# Altium PCB NE-CurrentSense-V1.0.PcbDoc
Units mm, origin at the board's own origin, x right, y up, seen from the top; angles counter-clockwise.
Board outline 94 x 55 mm, 2 copper layers (Top Layer, Bottom Layer); 35 components, 20 nets, 102 pads, 132 vias.
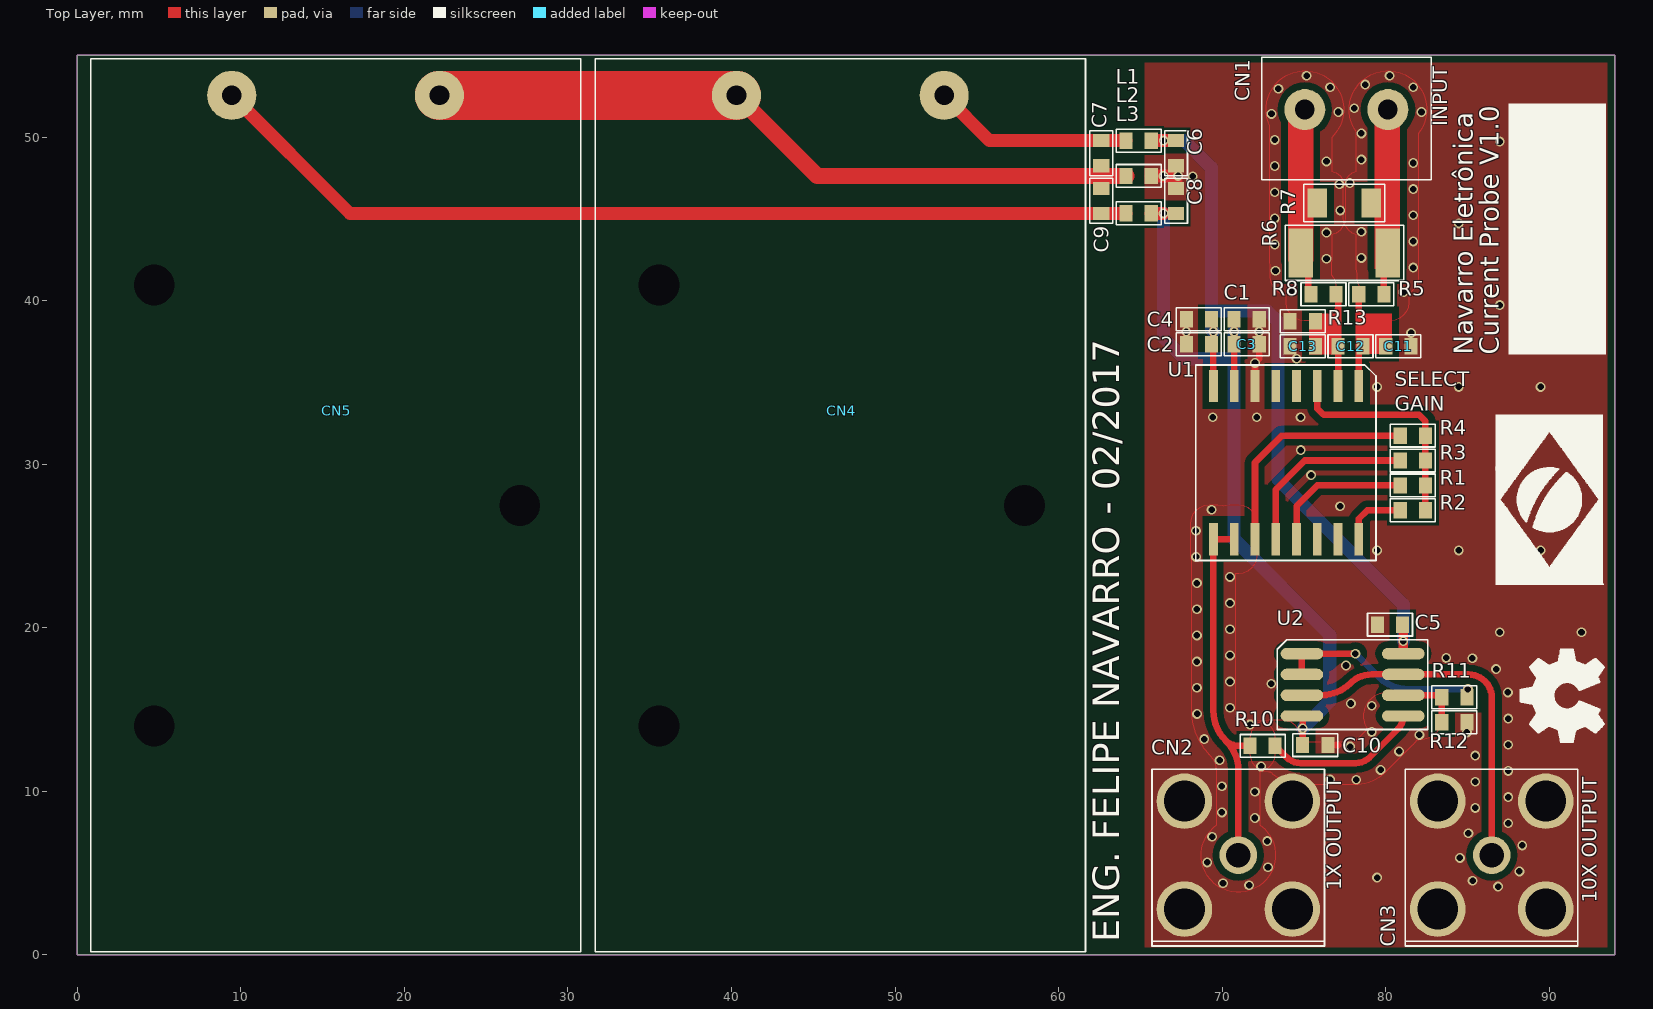
[diagram p0: Top Layer view]
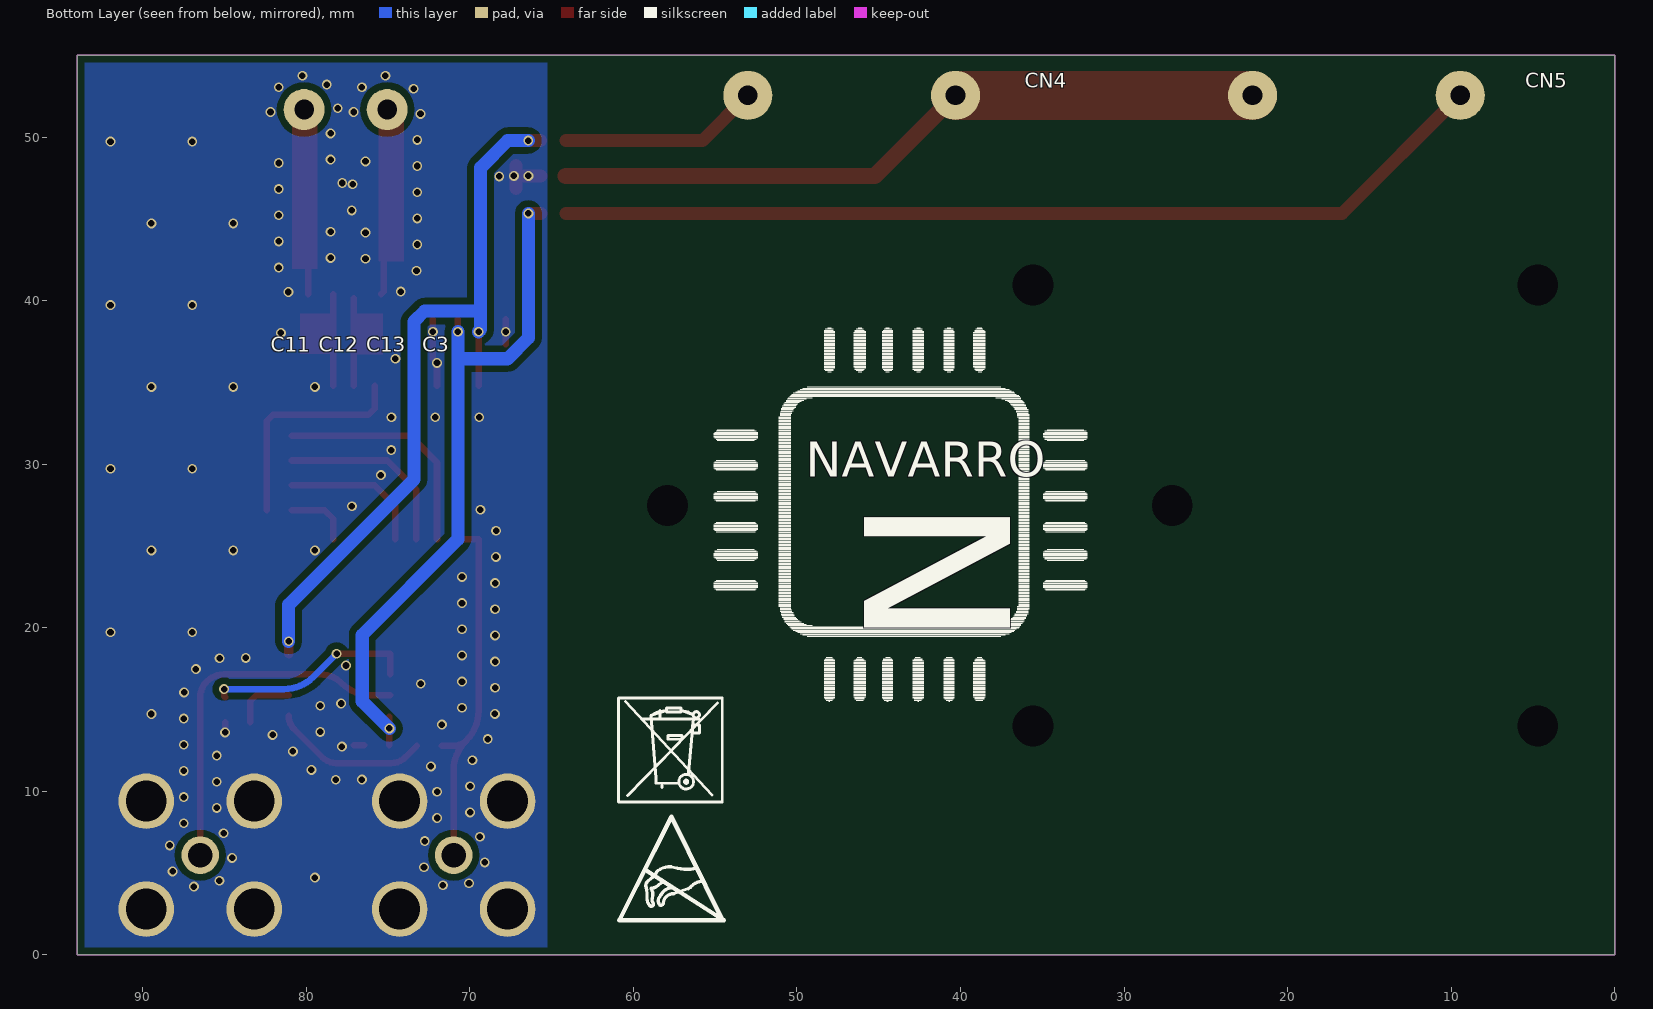
[diagram p1: Bottom Layer view, seen from below]
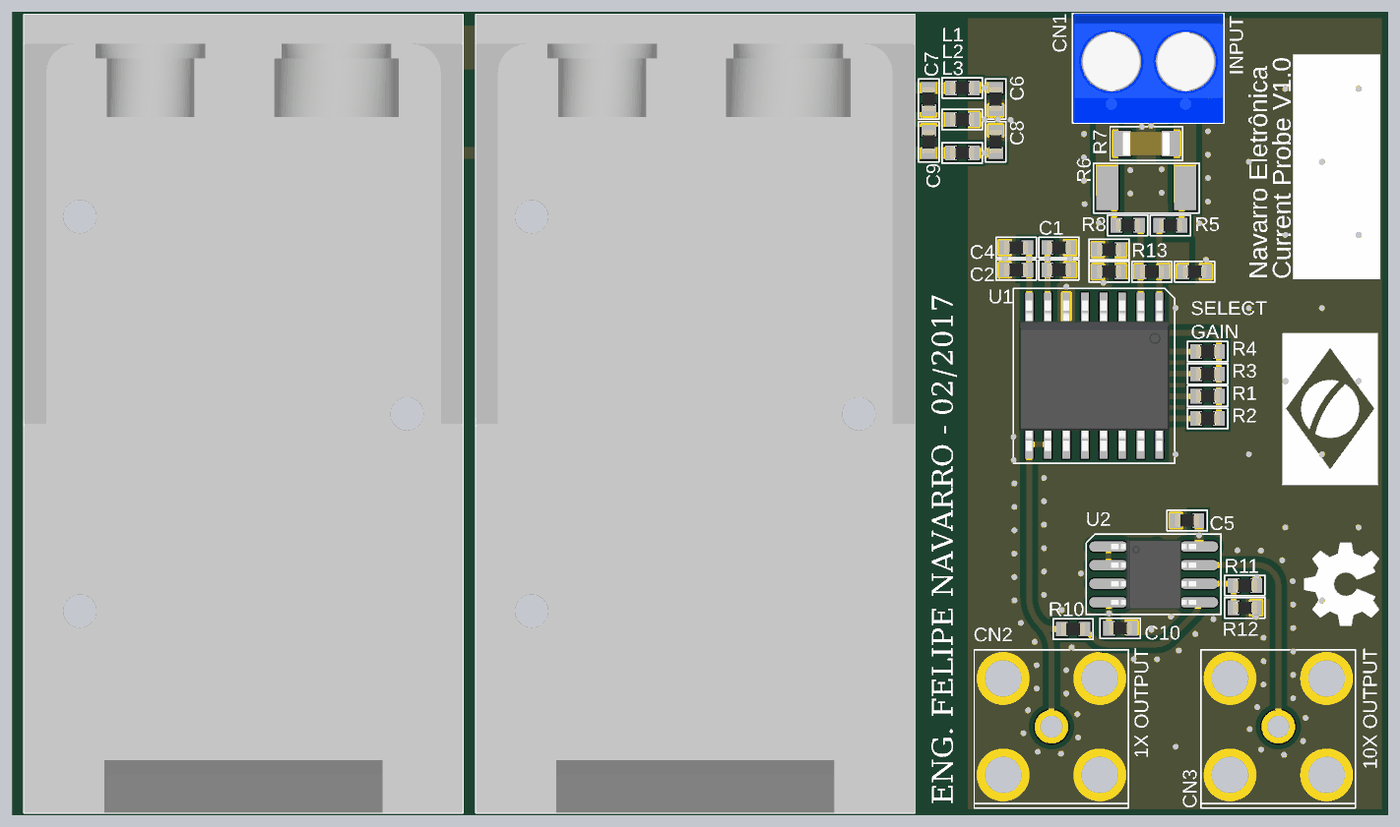
[diagram p2: 3D render of the assembled board from above, using the file's embedded part models]

## Layer stack, top to bottom
Top Solder: solder mask 0.0102, Solder Resist, Dk 3.5
Top Layer: signal copper 0.0356
Dielectric 1: dielectric 0.32, FR-4, Dk 4.8
Bottom Layer: signal copper 0.0356
Bottom Solder: solder mask 0.0102, Solder Resist, Dk 3.5

## Board outline
0,0 94,0 94,55 0,55

## Design rules (kind name [scope] priority, off if disabled: settings)
Clearance [InNet('GND')] p1: gap=0.4 ignorepadtopadclearanceinfootprint=FALSE except(0: Arc-Hole Track-Hole SMDPad-Hole THPad-Hole Via-Hole Fill-Hole Poly-Hole Region-Hole Text-Hole)
Clearance Clearance_1 [All] p2: gap=0.254 ignorepadtopadclearanceinfootprint=FALSE except(0: Arc-Hole Track-Hole SMDPad-Hole THPad-Hole Via-Hole Fill-Hole Poly-Hole Region-Hole Text-Hole)
PolygonConnect [All] p1: connectstyle=Direct reliefconductorwidth=0.254 reliefentries=4 polygonreliefangle="90 Angle" airgapwidth=0.254
RoomDefinition NE-CurrentSense-V1.0 [InComponentClass('NE-CurrentSense-V1.0')] p1: confinementstyle=ConfineIn formatcopy=TRUE lockcomponents=FALSE outline -25.527,-25.273 25.273,-25.273 25.273,0.127 -25.527,0.127
RoutingVias [All] p1: holewidth=0.711 width=1.27 viastyle="Through Hole" minholewidth=0.711 minwidth=1.27 maxholewidth=0.711 maxwidth=1.27
SolderMaskExpansion [All] p1: expansion=0.102
Width [All] p1: maxlimit=3 minlimit=0.254 preferedwidth=0.254
30 further rules are at their usual default settings.

## Components (designator, comment, footprint, x,y, rotation, side; value= is the part's Value field where it differs from the comment)
C1 "Capacitor Cerâmico" CC0603 71.501,38.862 r180 top value=1uF
C2 "Capacitor Cerâmico" CC0603 68.58,37.338 r0 top value=1uF
C3 "Capacitor Cerâmico" CC0603 71.501,37.338 r180 top value=100nF
C4 "Capacitor Cerâmico" CC0603 68.58,38.862 r0 top value=100nF
C5 "Capacitor Cerâmico" CC0603 80.264,20.193 r0 top value=100nF
C6 "Capacitor Cerâmico" CC0603 67.183,49.022 r90 top value=1uF
C7 "Capacitor Cerâmico" CC0603 62.611,49.022 r90 top value=1uF
C8 "Capacitor Cerâmico" CC0603 67.183,46.101 r90 top value=1uF
C9 "Capacitor Cerâmico" CC0603 62.611,46.101 r90 top value=1uF
C10 "Capacitor Cerâmico" CC0603 75.692,12.827 r0 top value=100nF
C11 "Capacitor Cerâmico" CC0603 80.772,37.211 r0 top value=100pF
C12 "Capacitor Cerâmico" CC0603 77.851,37.211 r0 top value=1nF
C13 "Capacitor Cerâmico" CC0603 74.93,37.211 r0 top value=100pF
CN1 "Screw" "CONN SCREW-2N P5.08" 75.057,51.689 r0 top value="Screw - 2 Polos"
CN2 "Conn BNC" "CONN BNC-JACK" 70.993,6.096 r180 top value="Jack BNC"
CN3 "Conn BNC" "CONN BNC-JACK" 86.487,6.096 r180 top value="Jack BNC"
CN4 "Holder" BATTHOLDER-9V-BH9V-PC-ND 46.736,33.274 r90 top value="Holder 9V BAT"
CN5 "Holder" BATTHOLDER-9V-BH9V-PC-ND 15.875,33.274 r90 top value="Holder 9V BAT"
L1 "Bead" CC0603 64.897,49.784 r180 top value=100R@100MHz
L2 "Bead" CC0603 64.897,47.625 r180 top value=100R@100MHz
L3 "Bead" CC0603 64.897,45.339 r180 top value=100R@100MHz
R1 "Resistor" CC0603 81.661,28.702 r0 top value=0R
R2 "Resistor Open" CC0603 81.661,27.178 r0 top value=OPEN
R3 "Resistor Open" CC0603 81.661,30.226 r0 top value=OPEN
R4 "Resistor Open" CC0603 81.661,31.75 r0 top value=OPEN
R5 "Resistor" CC0603 79.121,40.386 r180 top value=1K5
R6 "Resistor" CC2010 77.47,42.926 r0 top value=0R1
R7 "Resistor" CC1206 77.47,45.974 r0 top value=1R
R8 "Resistor" CC0603 76.2,40.386 r0 top value=1k5
R10 "Resistor" CC0603 72.475,12.775 r180 top value=100R
R11 "Resistor" CC0603 84.201,15.748 r0 top value=820
R12 "Resistor" CC0603 84.201,14.224 r180 top value=91R
R13 "Resistor" CC0603 74.93,38.735 r0 top value=1M
U1 "INA110" SOIC-16N_WIDE 73.914,30.099 r270 top
U2 "OPA2197" SOIC-8N 77.978,16.51 r0 top value=10MHz

## Footprints (in the part's own frame and the unit in brackets; to place one, negate y for a bottom-side part, rotate by r counter-clockwise, add the part's x,y. Pads: shape width x height; smd on the part's side, far side on the other; paste and mask are expansions set on the pad)
BATTHOLDER-9V-BH9V-PC-ND [mm]
  round 1.524 hole 2.5 unplated: 0(-19.285,11.175) 0(-5.805,-11.175) 0(7.685,11.175)
  round 3 hole 1.2: 1(19.285,6.435) 2(19.285,-6.265)
  silkscreen extent -33.08,-14.91 21.53,15.06, body extent -33.08,-14.91 21.53,15.06, height 20.7
CC0603 [mm] "Chip Resistor, 2-Leads, Body 1,6x0,8mm, IPC Medium Density"
  rect 0.8x1 smd: 1(-0.77,0) 2(0.77,0)
  silkscreen extent -1.38,-0.7 1.38,0.7, body extent -0.8,-0.42 0.8,0.43, height 0.45
CC1206 [mm] "Chip Resistor, 2-Leads, Body 3,2x1,6mm, IPC Medium Density"
  rect 1.2x1.75 smd: 1(-1.65,0) 2(1.65,0)
  silkscreen extent -2.47,-1.15 2.47,1.15, body extent -1.6,-0.8 1.6,0.8, height 1
CC2010 [mm] "Chip Resistor, 2-Leads, Body 5,0x2,5mm, IPC Medium Density"
  rect 1.5x3 smd: 1(-2.65,0) 2(2.65,0)
  silkscreen extent -3.61,-1.69 3.63,1.7, body extent -2.53,-1.27 2.53,1.28, height 2.5
"CONN BNC-JACK" [mm]
  round 2.3 hole 1.5: 1(0,0)
  round 3.4 hole 2.5: 2(-3.3,3.3) 2(-3.3,-3.3) 2(3.3,3.3) 2(3.3,-3.3)
  silkscreen extent -5.26,-5.26 5.28,5.55, body extent -5.16,-5.19 5.2,22.9, height 10.95
"CONN SCREW-2N P5.08" [mm] "Conector Header Shrouded Bloc. 2 Pin - Macho - 90º (Horizontal)"
  round 2.5 hole 1.2: 1(0,0) 2(5.08,0)
  silkscreen extent -2.63,-4.3 7.72,3.2, body extent -2.51,-4.3 7.65,3.2, height 10
SOIC-8N [mm] "SOIC, 8-Leads, Body 4.9x3.9mm, Pitch 1.27mm, IPC Medium Density"
  oval 2.6x0.7 smd: 1(-3.1,1.905) 2(-3.1,0.635) 3(-3.1,-0.635) 4(-3.1,-1.905) 5(3.1,-1.905) 6(3.1,-0.635) 7(3.1,0.635) 8(3.1,1.905)
  silkscreen extent -4.61,-2.73 4.6,2.76, body extent -2.9,-2.4 2.9,2.4, height 1.75
SOIC-16N_WIDE [mm] "SOIC, 16-Leads, Body 10,5x7,4mm (max), Pitch 1,27mm, IPC Medium Density"
  rect 1.98x0.53 smd: 1(-4.685,4.445) 2(-4.685,3.175) 3(-4.685,1.905) 4(-4.685,0.635) 5(-4.685,-0.635) 6(-4.685,-1.905) 7(-4.685,-3.175) 8(-4.685,-4.445) 9(4.685,-4.445) 10(4.685,-3.175) 11(4.685,-1.905) 12(4.685,-0.635) 13(4.685,0.635) 14(4.685,1.905) 15(4.685,3.175) 16(4.685,4.445)
  silkscreen extent -5.97,-5.52 5.99,5.49, body extent -5.15,-5.15 5.15,5.15, height 2.65

## Part data
C1 C2 C6 C7 C8 C9: library part "Cap 1uF 50V 0603 X5R", "Capacitor (Semiconductor SIM Model)", Supplier Part Number 1=587-2400-1-ND, Tolerância=±10%, ChinesePrice=0,01100, Chinês=Local, ComponentLink1Description=Datasheet, ComponentLink1URL=D:\Tecnoclade\Datasheet\!DataMissing.pdf, Corrente=*A, Obs=X5R, Potência=*W, Supplier 1=Digi-Key, Tensão=50V
C3 C4 C5 C10: library part "Cap 100nF 25V 0603 X7R", "Capacitor (Semiconductor SIM Model)", Supplier Part Number 1=490-1524-1-ND, Tolerância=±10%, ChinesePrice=0,00246, Chinês=Local, ComponentLink1Description=Datasheet, ComponentLink1URL=D:\Tecnoclade\Datasheet\!DataMissing.pdf, Corrente=*A, Obs=X7R, Potência=*W, Supplier 1=Digi-Key, Tensão=25V
C11 C12 C13: library part "Cap OPEN 0603", "Capacitor (Semiconductor SIM Model)", Supplier Part Number 1=--Del, Tolerância=±*%, ChinesePrice=0,00000, Chinês=-----, ComponentLink1Description=Datasheet, ComponentLink1URL=D:\Tecnoclade\Datasheet\!DataMissing.pdf, Corrente=*A, Potência=*W, Supplier 1=Digi-Key, Tensão=*V
CN1: library part "Screw-2 300V 12A P5.08mm", "Conector Screw Block", Tolerância="14-30 AWG", ChinesePrice=0,00000, Chinês=----, ComponentLink1Description=Datasheet, ComponentLink1URL=D:\Tecnoclade\Datasheet\!DataMissing.pdf, Corrente=12A, Obs="Through Hole, M3", Supplier 1=Digi-Key, Tensão=300VAC
CN2 CN3: "Conector BNC", Supplier Part Number 1=A97569-ND, ChinesePrice=0,00000, Chinês=----, ComponentLink1Description=Datasheet, ComponentLink1URL=D:\Tecnoclade\Datasheet\!DataMissing.pdf, Supplier 1=Digi-Key
CN4 CN5: library part "BattHolder 9V", Supplier Part Number 1=BH9V-PC-ND, ChinesePrice=0,00000, Chinês=----, ComponentLink1Description=Datasheet, ComponentLink1URL=D:\Tecnoclade\Datasheet\!DataMissing.pdf, Corrente=*A, Supplier 1=Digi-Key, Tensão=*V
L1 L2 L3: library part "Bd 100R@100MHz 0603 2A", Supplier Part Number 1=445-2984-1-ND, Tolerância=±25%, ChinesePrice=0,00000, Chinês=----, ComponentLink1Description=Datasheet, ComponentLink1URL=D:\Tecnoclade\Datasheet\!DataMissing.pdf, Corrente=2A, Obs="Ferrite (0R04)", Substituição=00/00/0000, Supplier 1=Digi-Key
R1 R5 R8: library part "Res 0R 0603 1/10W", Supplier Part Number 1=P0.0GCT-ND, Tolerância=Jumper, ChinesePrice=0,00089, Chinês=Local, ComponentLink1Description=Datasheet, ComponentLink1URL=D:\Tecnoclade\Datasheet\!DataMissing.pdf, Corrente=*A, Potência=1/10W, Supplier 1=Digi-Key, Tensão=*V
R2 R3 R4: library part "Res Open 0603", "Resistor", Supplier Part Number 1=--Del, Tolerância=±*%, ChinesePrice=0,00000, Chinês=----, ComponentLink1Description=Datasheet, ComponentLink1URL=D:\Tecnoclade\Datasheet\!DataMissing.pdf, Corrente=*A, Potência=*W, Supplier 1=Digi-Key, Tensão=*V
R6: library part "Shunt 0R1 1% 2010 1W", "Resistor Shunt", Supplier Part Number 1=CRM2010-FX-R100ELFCT-ND, Tolerância=±1%, ChinesePrice=0,02300, Chinês=Local, ComponentLink1Description=Datasheet, ComponentLink1URL=D:\Tecnoclade\Datasheet\!DataMissing.pdf, Corrente=*A, Potência=1W, Supplier 1=Digi-Key, Tensão=*V
R7: library part "Res 931R 1% 0603 1/10W", Supplier Part Number 1=RMCF0603FT931RCT-ND, Tolerância=±1%, ChinesePrice=0,00110, Chinês=Local, ComponentLink1Description=Datasheet, ComponentLink1URL=D:\Tecnoclade\Datasheet\!DataMissing.pdf, Corrente=*A, Obs=±100ppm/ºC, Potência=1/2W, Supplier 1=Digi-Key, Tensão=*V
R10: library part "Res 100R 5% 0603 1/10W", Supplier Part Number 1=RMCF0603JT100RCT-ND, Tolerância=±5%, ChinesePrice=0,00080, Chinês=Local, ComponentLink1Description=Datasheet, ComponentLink1URL=D:\Tecnoclade\Datasheet\!DataMissing.pdf, Corrente=*A, Potência=1/10W, Supplier 1=Digi-Key, Tensão=*V
R11: library part "Res 9K76 1% 0603 1/10W", Supplier Part Number 1=311-8.20KHRCT-ND, Tolerância=±1%, ChinesePrice=0,00000, Chinês=----, ComponentLink1Description=Datasheet, ComponentLink1URL=D:\Tecnoclade\Datasheet\!DataMissing.pdf, Corrente=*A, Obs=±100ppm/ºC, Potência=1/10W, Supplier 1=Digi-Key, Tensão=*V
R12: library part "Res 976R 1% 0603 1/10W", Supplier Part Number 1=311-910LRCT-ND, Tolerância=±1%, ChinesePrice=0,00000, Chinês=----, ComponentLink1Description=Datasheet, ComponentLink1URL=D:\Tecnoclade\Datasheet\!DataMissing.pdf, Corrente=*A, Obs=±100ppm/ºC, Potência=1/10W, Supplier 1=Digi-Key, Tensão=*V
R13: library part "Res 1M 1% 0603 1/10W", Supplier Part Number 1=RMCF0603FT1M00CT-ND, Tolerância=±1%, ChinesePrice=0,00089, Chinês=Local, ComponentLink1Description=Datasheet, ComponentLink1URL=D:\Tecnoclade\Datasheet\!DataMissing.pdf, Corrente=*A, Obs=±100ppm/ºC, Potência=1/10W, Supplier 1=Digi-Key, Tensão=*V
U1: "Fast-Settling FET-Input  INSTRUMENTATION AMPLIFIER", Supplier Part Number 1=INA110KU-ND, ChinesePrice=0,00000, Chinês=----, ComponentLink1Description=Datasheet, ComponentLink1URL=D:\Tecnoclade\Datasheet\, Supplier 1=Digi-Key
U2: "OPAx197 36-V, Precision, Rail-to-Rail Input/Output, Low Offset Voltage, Operational Amplifiers", ChinesePrice=0,00000, Chinês=----, ComponentLink1Description=Datasheet, ComponentLink1URL=D:\Tecnoclade\Datasheet\, Corrente=65mA, Obs=Rail-To-Rail, Supplier 1=Digi-Key, Tensão=36V

## Via types
v1: diameter 0.6, hole 0.4, Top Layer to Bottom Layer, tented both sides, 132 vias

## Nets (pads, with @x,y where several pads share a name; then routed paths per layer and width w, separated by ;. In a path a pad name is that pad's centre, name@x,y a point inside that pad or via, vN(x,y) a via of type N, cw(c..) or ccw(c..) an arc to the next point about the centre after c; other vN are vias at no path point)
+9V: C2.2 C4.2 C5.2 C6.2 L1.1 U1.8 U2.8 | length 48.1
  Top Layer w0.4: C4.2 69.469,38.743 v1(69.469,38.1) U1.8
  Top Layer w0.6: U2.8 v1(81.078,19.177) C5.2@81.078,20.149
  Top Layer w0.8: L1.1@65.675,49.792 v1(66.429,49.792) C6.2
  Bottom Layer w0.8: v1(66.429,49.792) 67.683,49.792 69.342,48.133 69.342,39.37 ; v1(69.469,38.1) 69.342,38.227 69.342,39.37 ; v1(81.078,19.177) 81.078,21.411 73.406,29.083 73.406,38.735 72.771,39.37 69.342,39.37
-9V: C1.2 C3.2 C8.1 C10.1 L3.1 U1.7 U2.4 | length 46.4
  Top Layer w0.4: C1.2 v1(70.732,38.1) 70.734,37.338 U1.7 ; C10.1 v1(74.922,13.843) U2.4@74.922,14.561
  Top Layer w0.8: L3.1 v1(66.421,45.339)
  Bottom Layer w0.8: v1(66.421,45.339) 66.421,37.719 67.691,36.449 70.732,36.449 ; v1(70.732,38.1) 70.732,25.407 76.581,19.558 76.581,15.502 v1(74.922,13.843)
GND: C1.1 C2.1 C3.1 C4.1 C5.1 C6.1 C8.2 C10.2 C11.2 C13.1 CN2.2 CN3.2 L2.1 R12.1 R13.1 U1.6 | length 9.7
  Top Layer w0.4: C2.1 C4.1 ; U1.6 v1(72.009,36.195) 72.271,36.457 C3.1 C1.1 ; C10.2 77.089,12.827 ; v1(84.971,13.597) R12.1
  Top Layer w0.8: L2.1 v1@67.056,47.625 ; C8.2 C6.1
  other v1: 86.876,4.174 71.648,4.249 70.053,4.376 85.316,4.528 79.473,4.727 88.178,5.104 72.804,5.355 69.084,5.649 84.536,5.925 88.356,6.695 72.756,6.955 69.388,7.22 85.057,7.438 87.498,8.045 72.004,8.367 69.982,8.705 85.476,8.982 87.498,9.645 72.004,9.967 69.982,10.305 85.476,10.582 76.602,10.714 78.202,10.709 87.498,11.245 79.687,11.305 72.379,11.522 69.846,11.899 85.476,12.182 80.817,12.438 77.822,12.736 87.498,12.845 68.901,13.191 82.06,13.445 79.15,13.629 71.705,14.082 87.498,14.445 68.465,14.73 89.473,14.727 70.48,15.11 79.154,15.229 77.871,15.367 87.475,16.045 68.458,16.33 73.005,16.576 70.48,16.71 86.755,17.474 77.574,17.692 68.458,17.93 85.3,18.14 83.7,18.156 70.48,18.31 68.458,19.53 86.973,19.727 91.973,19.727 70.48,19.91 68.458,21.13 70.48,21.51 68.458,22.73 70.48,23.11 68.41,24.33 79.473,24.727 84.473,24.727 89.473,24.727 68.397,25.929 69.355,27.211 77.216,27.432 75.438,29.337 86.973,29.727 91.973,29.727 74.803,30.861 69.425,32.875 72.112,32.875 74.8,32.875 79.473,34.727 84.473,34.727 89.473,34.727 74.55,36.45 67.81,38.1 72.263,38.1 86.973,39.727 91.973,39.727 81.098,40.53 74.223,40.555 73.263,41.835 81.682,42.02 76.382,42.564 78.518,42.616 73.218,43.434 81.682,43.62 76.382,44.164 78.518,44.216 84.473,44.727 89.473,44.727 73.218,45.034 81.682,45.22 77.227,45.523 73.218,46.634 81.682,46.82 77.173,47.122 77.798,47.197 68.2,47.6 66.421,47.625 67.31,47.625 73.218,48.234 81.682,48.42 76.382,48.512 78.518,48.626 86.973,49.727 91.973,49.727 73.218,49.834 78.518,50.226 73.018,51.421 77.112,51.536 82.192,51.536 78.076,51.763 73.443,52.964 76.603,53.053 81.683,53.053 78.749,53.215 75.162,53.75 80.242,53.75
NetC7_1: C7.1 C9.2 CN4.1 CN5.2 L2.2 | length 44
  Top Layer w1: CN4.1 45.235,47.625 L2.2
  Top Layer w3: CN5.2 CN4.1
NetC7_2: C7.2 CN4.2 L1.2 | length 12.3
  Top Layer w0.8: CN4.2 55.768,49.792 C7.2 ; C7.2@62.619,49.784 L1.2
NetC9_1: C9.1 CN5.1 L3.2 | length 57.7
  Top Layer w0.8: CN5.1 16.668,45.331 C9.1 ; C9.1@62.619,45.339 L3.2
NetC11_1: C11.1 C12.2 R5.2 U1.1 | length 5.6
  Top Layer w0.4: U1.1 R5.2@78.359,40.378
NetC12_1: C12.1 C13.2 R8.2 R13.2 U1.2 | length 5.4
  Top Layer w0.4: U1.2 R8.2@77.089,40.14
NetCN1_1: CN1.1 R6.1 R7.1 R8.1 | length 3
  Top Layer w0.4: R6.1 75.275,42.471 75.275,40.541 R8.1
  Top Layer w1.3: CN1.1 CN1.1@75.203,51.543
NetCN1_2: CN1.2 R5.1 R6.2 R7.2 | length 2.5
  Top Layer w0.4: R5.1 R6.2@79.891,42.697
  Top Layer w1.3: CN1.2@79.991,51.543 CN1.2
NetCN2_1: CN2.1 R10.2 U1.9 U1.10 | length 22.6
  Top Layer w0.4: U1.10 U1.9 69.469,14.908 ccw(c72.009,14.908) 70.213,13.112 ; CN2.1 70.993,11.28 ccw(c68.453,11.28) 70.249,13.076 70.213,13.112 ; R10.2 71.027,12.775 cw(c71.027,13.926) 70.213,13.112
NetCN3_1: CN3.1 U2.3 U2.7 | length 22.4
  Top Layer w0.4: U2.3 76.075,15.875 ccw(c76.075,18.35) 77.825,16.6 cw(c79.141,15.284) 79.141,17.145 U2.7 85.061,17.145 cw(c85.061,15.711) 86.075,16.725 cw(c85.08,15.73) 86.487,15.73 CN3.1
NetR1_1: R1.1 U1.13 | length 8.9
  Top Layer w0.4: U1.13 74.549,27.432 75.819,28.702 R1.1
NetR2_1: R2.1 U1.16 | length 4
  Top Layer w0.4: U1.16 78.359,26.67 78.867,27.178 R2.1
NetR3_1: R3.1 U1.12 | length 11.4
  Top Layer w0.4: U1.12 73.279,28.448 75.057,30.226 R3.1
NetR4_1: R4.1 U1.11 | length 14.3
  Top Layer w0.4: U1.11 72.009,30.099 73.66,31.75 R4.1
NetR10_1: R10.1 U2.5 | length 9.6
  Top Layer w0.4: R10.1 73.938,12.082 ccw(c74.8,12.944) 74.8,11.725 78.18,11.725 ccw(c78.18,12.92) 79.025,12.075 80.741,13.791 ccw(c79.926,14.605) U2.5
NetR11_1: R11.1 R12.2 U2.6 | length 3.8
  Top Layer w0.4: U2.6 83.058,15.875 83.431,15.502 83.431,14.986 R12.2
NetR11_2: R11.2 U2.1 U2.2 | length 12.7
  Top Layer w0.4: U2.2 U2.1 v1(78.15,18.415) ; R11.2 85.025,15.802 v1(85.025,16.25)
  Bottom Layer w0.4: v1(78.15,18.415) 79.571,16.994 ccw(c81.367,18.79) 81.367,16.25 v1(85.025,16.25)
RG: R1.2 R2.2 R3.2 R4.2 U1.3 | length 13.8
  Top Layer w0.4: U1.3 75.819,33.401 76.2,33.02 82.042,33.02 82.431,32.631 R4.2 R3.2 R1.2 R2.2
pads on no net: CN4.0 CN5.0 U1.4 U1.5 U1.14 U1.15
copper on no net:
  other v1: 81.55,38.025

## Polygon pours and split planes (outlines as drawn)
GND on Top Layer "Top Layer-GND 4" (solid, pour order 20): 158 vertices, not listed, extent 71.73,10.398 83.497,16.076
GND on Top Layer "Top Layer-GND 3" (solid, pour order 18): 80.609,54.012 80.771,53.968 80.89,53.937 81.194,53.811 81.446,53.665 81.707,53.465 81.913,53.259 82.113,52.998 82.191,52.863 82.259,52.746 82.385,52.442 82.46,52.161 82.503,51.834 82.503,51.689 82.503,51.544 82.46,51.217 82.385,50.936 82.259,50.632 82.191,50.515 82.113,50.38 81.99,50.219 81.99,41.95 81.985,41.912 81.985,41.426 81.947,41.138 81.835,40.869 81.658,40.638 81.427,40.461 81.406,40.452 81.406,39.886 81.368,39.598 81.256,39.329 81.079,39.098 80.848,38.921 80.579,38.809 80.291,38.771 79.491,38.771 79.203,38.809 78.934,38.921 78.703,39.098 78.526,39.329 78.414,39.598 78.376,39.886 78.376,40.886 78.381,40.925 78.293,41.138 78.255,41.426 78.255,41.645 78.248,41.662 78.21,41.95 78.21,44.031 77.963,44.134 77.732,44.311 77.555,44.542 77.443,44.811 77.405,45.099 77.405,46.849 77.443,47.137 77.555,47.406 77.732,47.637 77.963,47.814 78.21,47.917 78.21,50.316 78.161,50.38 78.083,50.515 78.015,50.632 77.889,50.936 77.814,51.217 77.771,51.544 77.771,51.689 77.771,51.834 77.814,52.161 77.889,52.442 78.015,52.746 78.083,52.863 78.161,52.998 78.361,53.259 78.567,53.465 78.828,53.665 78.92,53.718 79.08,53.811 79.384,53.937 79.665,54.012 79.992,54.055 80.137,54.055 80.282,54.055
GND on Top Layer "Top Layer-GND 2" (solid, pour order 16): 75.529,54.012 75.81,53.937 76.114,53.811 76.231,53.743 76.366,53.665 76.627,53.465 76.833,53.259 77.033,52.998 77.111,52.863 77.179,52.746 77.305,52.442 77.38,52.161 77.423,51.834 77.423,51.689 77.423,51.544 77.38,51.217 77.305,50.936 77.179,50.632 77.111,50.515 77.033,50.38 76.833,50.119 76.69,49.976 76.69,47.928 76.708,47.926 76.977,47.814 77.208,47.637 77.385,47.406 77.497,47.137 77.535,46.849 77.535,45.099 77.497,44.811 77.385,44.542 77.208,44.311 76.977,44.134 76.708,44.022 76.69,44.02 76.69,42.4 76.685,42.362 76.685,41.588 76.795,41.443 76.907,41.174 76.945,40.886 76.945,39.886 76.907,39.598 76.795,39.329 76.618,39.098 76.387,38.921 76.118,38.809 75.83,38.771 75.03,38.771 74.742,38.809 74.473,38.921 74.242,39.098 74.065,39.329 73.953,39.598 73.915,39.886 73.915,40.332 73.782,40.349 73.513,40.461 73.282,40.638 73.105,40.869 72.993,41.138 72.955,41.426 72.955,42.095 72.948,42.112 72.91,42.4 72.91,50.692 72.809,50.936 72.734,51.217 72.691,51.544 72.691,51.689 72.691,51.834 72.734,52.161 72.809,52.442 72.935,52.746 73.003,52.863 73.081,52.998 73.281,53.259 73.487,53.465 73.748,53.665 73.883,53.743 74,53.811 74.304,53.937 74.585,54.012 74.912,54.055 75.057,54.055 75.202,54.055
GND on Top Layer "Top Layer-GND 1" (solid, pour order 14): 248 vertices, not listed, extent 72.459,3.831 88.752,18.616
GND on Top Layer "Top Layer-GND" (solid, pour order 12): 71.292,27.481 71.561,27.369 71.792,27.192 71.969,26.961 72.081,26.692 72.119,26.404 72.119,24.424 72.081,24.136 71.969,23.867 71.792,23.636 71.561,23.459 71.292,23.347 71.004,23.309 70.788,23.309 70.788,14.938 70.814,14.67 70.883,14.442 70.947,14.323 71.017,14.352 71.305,14.39 72.105,14.39 72.393,14.352 72.662,14.24 72.893,14.063 73.07,13.832 73.182,13.563 73.22,13.275 73.22,12.275 73.182,11.987 73.07,11.718 72.893,11.487 72.662,11.31 72.393,11.198 72.312,11.188 72.312,7.939 72.492,7.801 72.595,7.698 72.698,7.595 72.882,7.355 73.027,7.103 73.143,6.823 73.219,6.542 73.258,6.242 73.258,6.096 73.258,5.951 73.219,5.65 73.163,5.445 73.143,5.369 73.027,5.09 72.974,4.997 72.882,4.838 72.698,4.597 72.595,4.495 72.492,4.392 72.252,4.207 72,4.062 71.72,3.946 71.439,3.871 71.139,3.831 70.993,3.831 70.848,3.831 70.547,3.871 70.342,3.926 70.266,3.946 69.987,4.062 69.894,4.115 69.735,4.207 69.494,4.392 69.391,4.495 69.289,4.597 69.104,4.838 68.959,5.09 68.843,5.369 68.768,5.65 68.728,5.951 68.728,6.096 68.728,6.242 68.768,6.542 68.823,6.748 68.843,6.823 68.959,7.103 69.012,7.195 69.104,7.355 69.289,7.595 69.391,7.698 69.494,7.801 69.675,7.939 69.675,11.25 69.648,11.518 69.579,11.746 69.466,11.957 69.309,12.148 69.275,12.174 69.238,12.223 69.218,12.241 69.194,12.269 69.179,12.284 69.174,12.292 68.938,12.569 68.89,12.642 68.835,12.71 68.61,13.078 68.574,13.158 68.53,13.234 68.365,13.632 68.343,13.717 68.311,13.799 68.211,14.218 68.201,14.305 68.183,14.391 68.149,14.821 68.152,14.865 68.146,14.908 68.15,14.943 68.15,24.08 68.127,24.136 68.089,24.424 68.089,26.404 68.127,26.692 68.239,26.961 68.416,27.192 68.647,27.369 68.916,27.481 69.204,27.519 69.734,27.519 70.022,27.481 70.104,27.447 70.186,27.481 70.474,27.519 71.004,27.519
GND on Top Layer "Top Layer-No Net" (solid, pour order 8): 65.275,55 65.275,0.06 ccw(c65.36,0.06) 65.3,0 94,0 cw(c94.241,0.241) 93.9,0.241 93.9,55
GND on Bottom Layer "Top Layer-No Net" (solid, pour order 10): 65.275,55 65.275,0.06 ccw(c65.36,0.06) 65.3,0 94,0 cw(c94.241,0.241) 93.9,0.241 93.9,55

## Keep-outs
Keep-Out Layer:
  the board outline again, w0.1

## Other copper
Top Layer:
  rectangle net NetCN1_1: 74.025,42.4 75.575,51.475
  rectangle net NetCN1_2: 79.325,41.95 80.875,51.025
  rectangle net NetC12_1: 75.3,36.7 76.95,39.225
  rectangle net NetC11_1: 78.475,36.725 80.4,39.225

## Silkscreen, mask and mechanical layers (free items; w line width, h text height)
Top Overlay:
  drawing of 1817 lines, arcs and shapes, not listed
  text "INPUT" at 84.074,50.673 h1.52 r90
  text "Navarro Eletrônica" at 85.725,36.703 h2 r90
  text "Current Probe V1.0" at 87.325,36.703 h2 r90
  text "SELECT / GAIN" at 80.55,32.95 h1.52
  text "1X OUTPUT" at 77.597,3.937 h1.52 r90
  text "10X OUTPUT" at 93.218,3.179 h1.52 r90
  text "ENG. FELIPE NAVARRO - 02/2017" at 64.25,0.775 h2.8 r90
Bottom Overlay:
  drawing of 1078 lines, arcs and shapes, not listed
  text "NAVARRO" at 49.464,28.529 h3.69
  text "N" at 49.66,27.959 h19.92 r90